# EAGLE board powerboard (EAGLE 7.7.0)

Size 100 x 80 mm. Coordinates in mm from the lower left corner, seen from the top.
Outline: 0,0 100,0 100,80 0,80 0,0
Copper layers (1*16): Top 0.035mm / dielectric 1.5mm / Bottom 0.035mm
Design rules "default": minimum track width 10mil, minimum drill 24mil, track to track 8mil, track to pad 8mil, pad to pad 8mil, via to via 8mil, smd to smd 8mil, copper to edge 40mil, drill to drill 8mil, minimum pad ring 10mil, minimum via ring 8mil, stop-mask expansion 4mil, vias tented up to drill 0mil, thermal gap 10mil

## Footprints (pad centres in the part's own frame; a part is rotated, then mirrored left to right if it is on the bottom)
W237-102 = drill 1.194 long: 1 -2.5,-1.27; 2 2.5,-1.27
1210 = smd 1.2 x 2: 1 -1.6,0; 2 1.6,0
C1808 = smd 1.6 x 2.2: 1 -1.95,0; 2 1.95,0
0603-CAP = smd 1.1 x 1: 1 -0.85,0; 2 0.85,0
PANASONIC_G = smd 3.9 x 1.6: + 4.25,0; - -4.25,0
1N6277A = drill 1.499 long: A 7.62,0; C -7.62,0
FUSE_5MM = drill 2.54 pad 3.556: 1 0,-10; 2 0,-4.158; 3 0,4.158; 4 0,10
WE-HCI_7030/7040/7050 = smd 2.5 x 3: 1 -2.45,0; 2 2.45,0
AXA04AXX-L = drill 1.2 pad 3.048: +VIN 2.54,-10.16; +VOUT 10.16,10.16; -VIN -2.54,-10.16; -VOUT -10.16,10.16; REMOTE -10.16,-10.16; TRIM/COMMON 0,10.16
IRFB7434PBF = drill 1.118 long: DRAIN 0,-6.35; GATE -2.54,-6.35; SOURCE 2.54,-6.35 | hole 3.302: 0,11.176

## Placement (x,y rotation side)
BATTERY  [W237-102]  21.27,5.71 0 top
C6  3.3uF  [1210]  31.43,58.1 270 top
C7  220pF  [C1808]  47.31,39.37 0 top
C8  0.1uF  [0603-CAP]  13.49,24.13 90 top
C9  220uF  [PANASONIC_G]  7.78,31.59 180 top
D5  1N6277A  [1N6277A]  15.24,41.43 0 top
F1  FUSEX20MM  [FUSE_5MM]  7.62,13.34 180 top
L1  [WE-HCI_7030/7040/7050]  28.73,48.9 90 top
U$2  AXA04AXX-L  [AXA04AXX-L]  47.47,53.98 270 top
U$3  IRFB7434PBF  [IRFB7434PBF]  21.27,22.07 0 top

## Library data of the parts
BATTERY = con-wago-500; MPN: 237-102; OC_FARNELL: unknown; OC_NEWARK: 70K9898
C6 = SparkFun-Capacitors
C7 = resistor
C8 = SparkFun-Capacitors; PROD_ID: CAP-08604
C9 = rcl
D5 U$2 U$3 = powerboard
F1 = SparkFun-Passives
L1 = WE-HCI; MPN: 744314650; OC_FARNELL: 1636198; OC_NEWARK: 08P2581; PACKAGE: 7050; SUPPLIER: Würth Elektronik eiSos GmbH

## Nets
5V: C7.2 U$2.+VOUT
GND: C6.2 D5.A U$2.-VIN U$2.-VOUT U$3.SOURCE
N$10: C7.1 L1.2 U$2.+VIN
N$11: BATTERY.1 F1.3
N$12: BATTERY.2 C8.2 C9.- U$3.DRAIN
V_BATT: C6.1 C8.1 C9.+ D5.C F1.1 L1.1 U$3.GATE

## Tracks (layer width: path | path; a pad name or v marks a point on that pad's centre or on a via)
5V  (1 unrouted)
GND  (4 unrouted)
N$10  (2 unrouted)
N$11  (1 unrouted)
N$12  (3 unrouted)
V_BATT  (6 unrouted)